# Altium PCB sinc_counter.PcbDoc
Units mm, origin at the board's own origin, x right, y up, seen from the top; angles counter-clockwise.
Board outline 60.07 x 50.04 mm, 2 copper layers (Top Layer, Bottom Layer); 8 components, 11 nets, 75 pads, 20 vias.
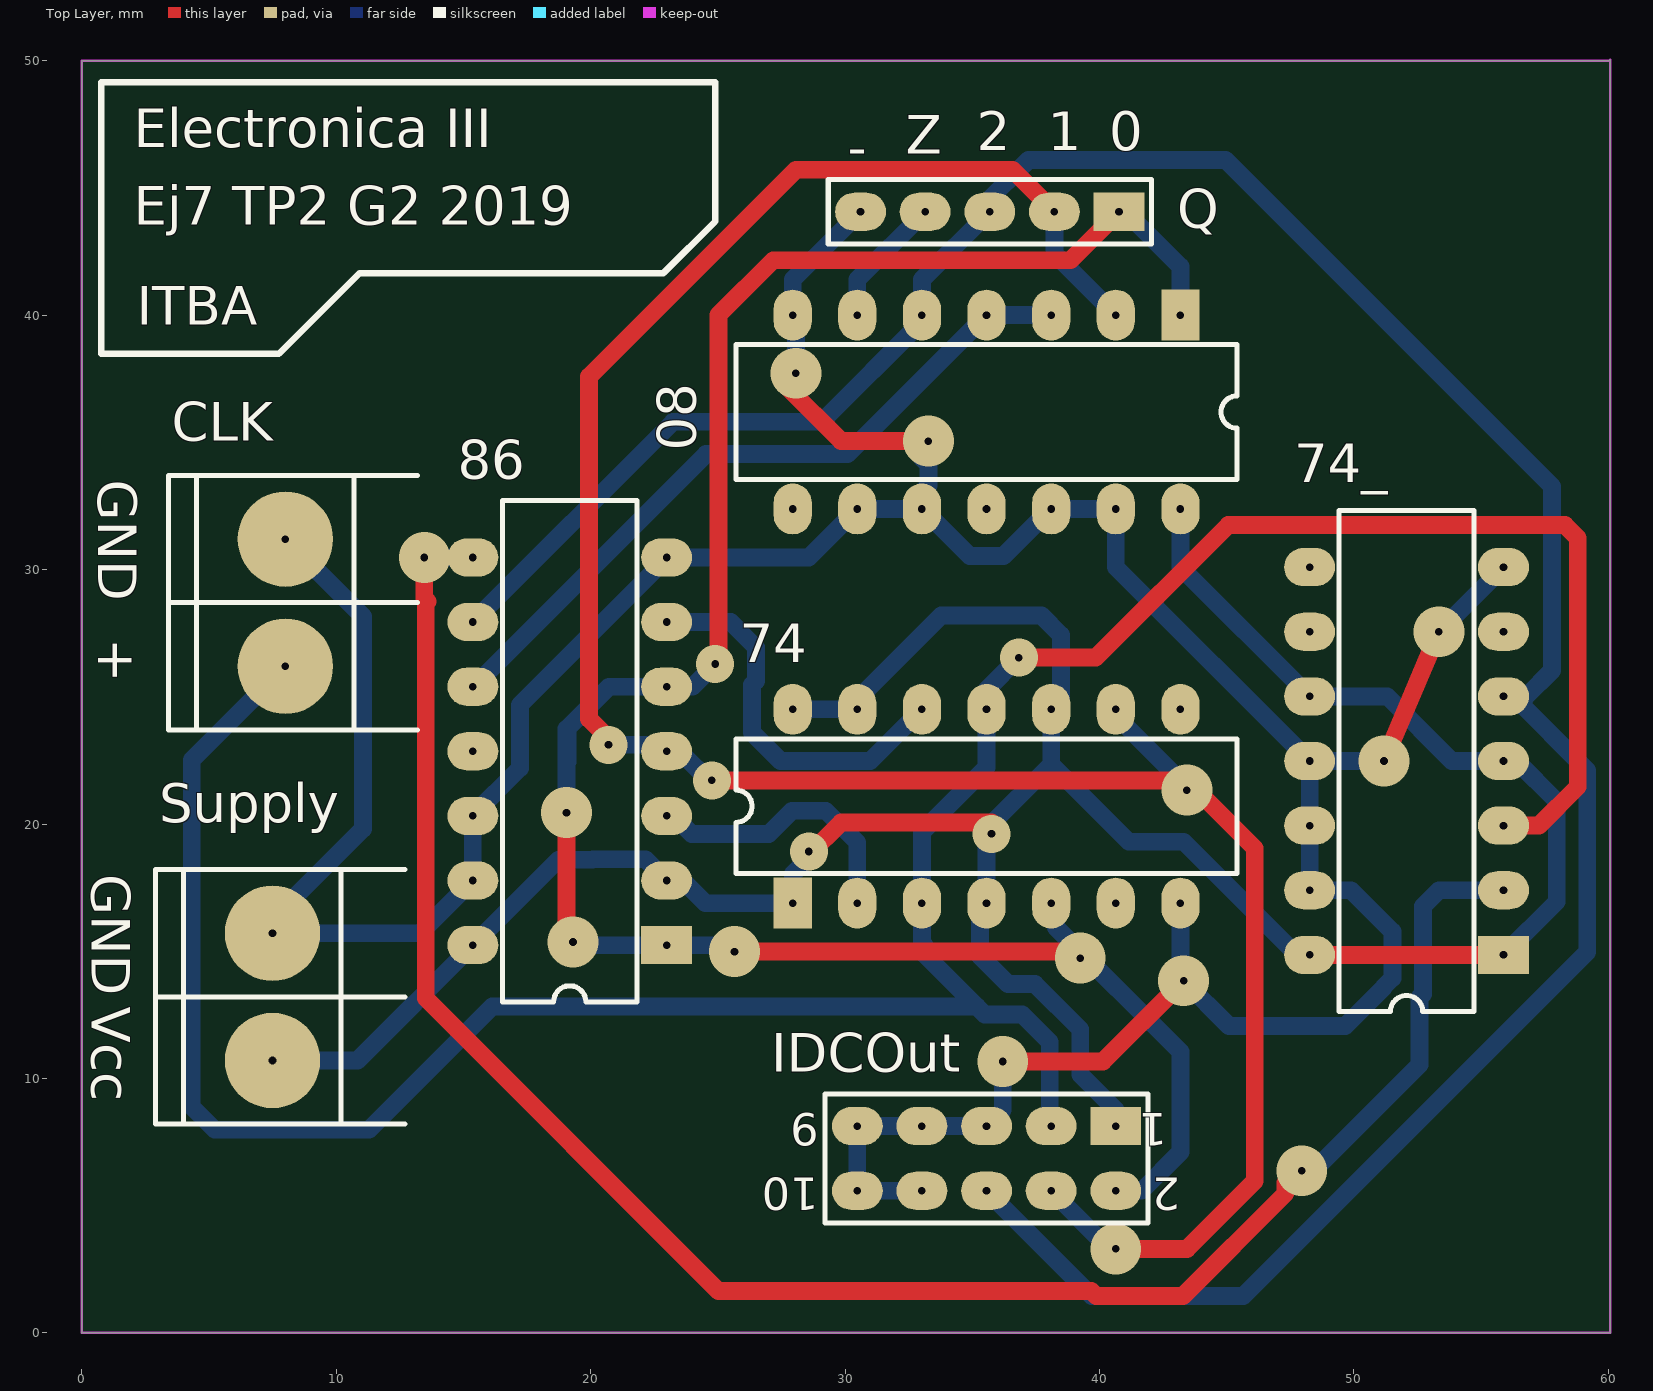
[diagram p0: Top Layer view]
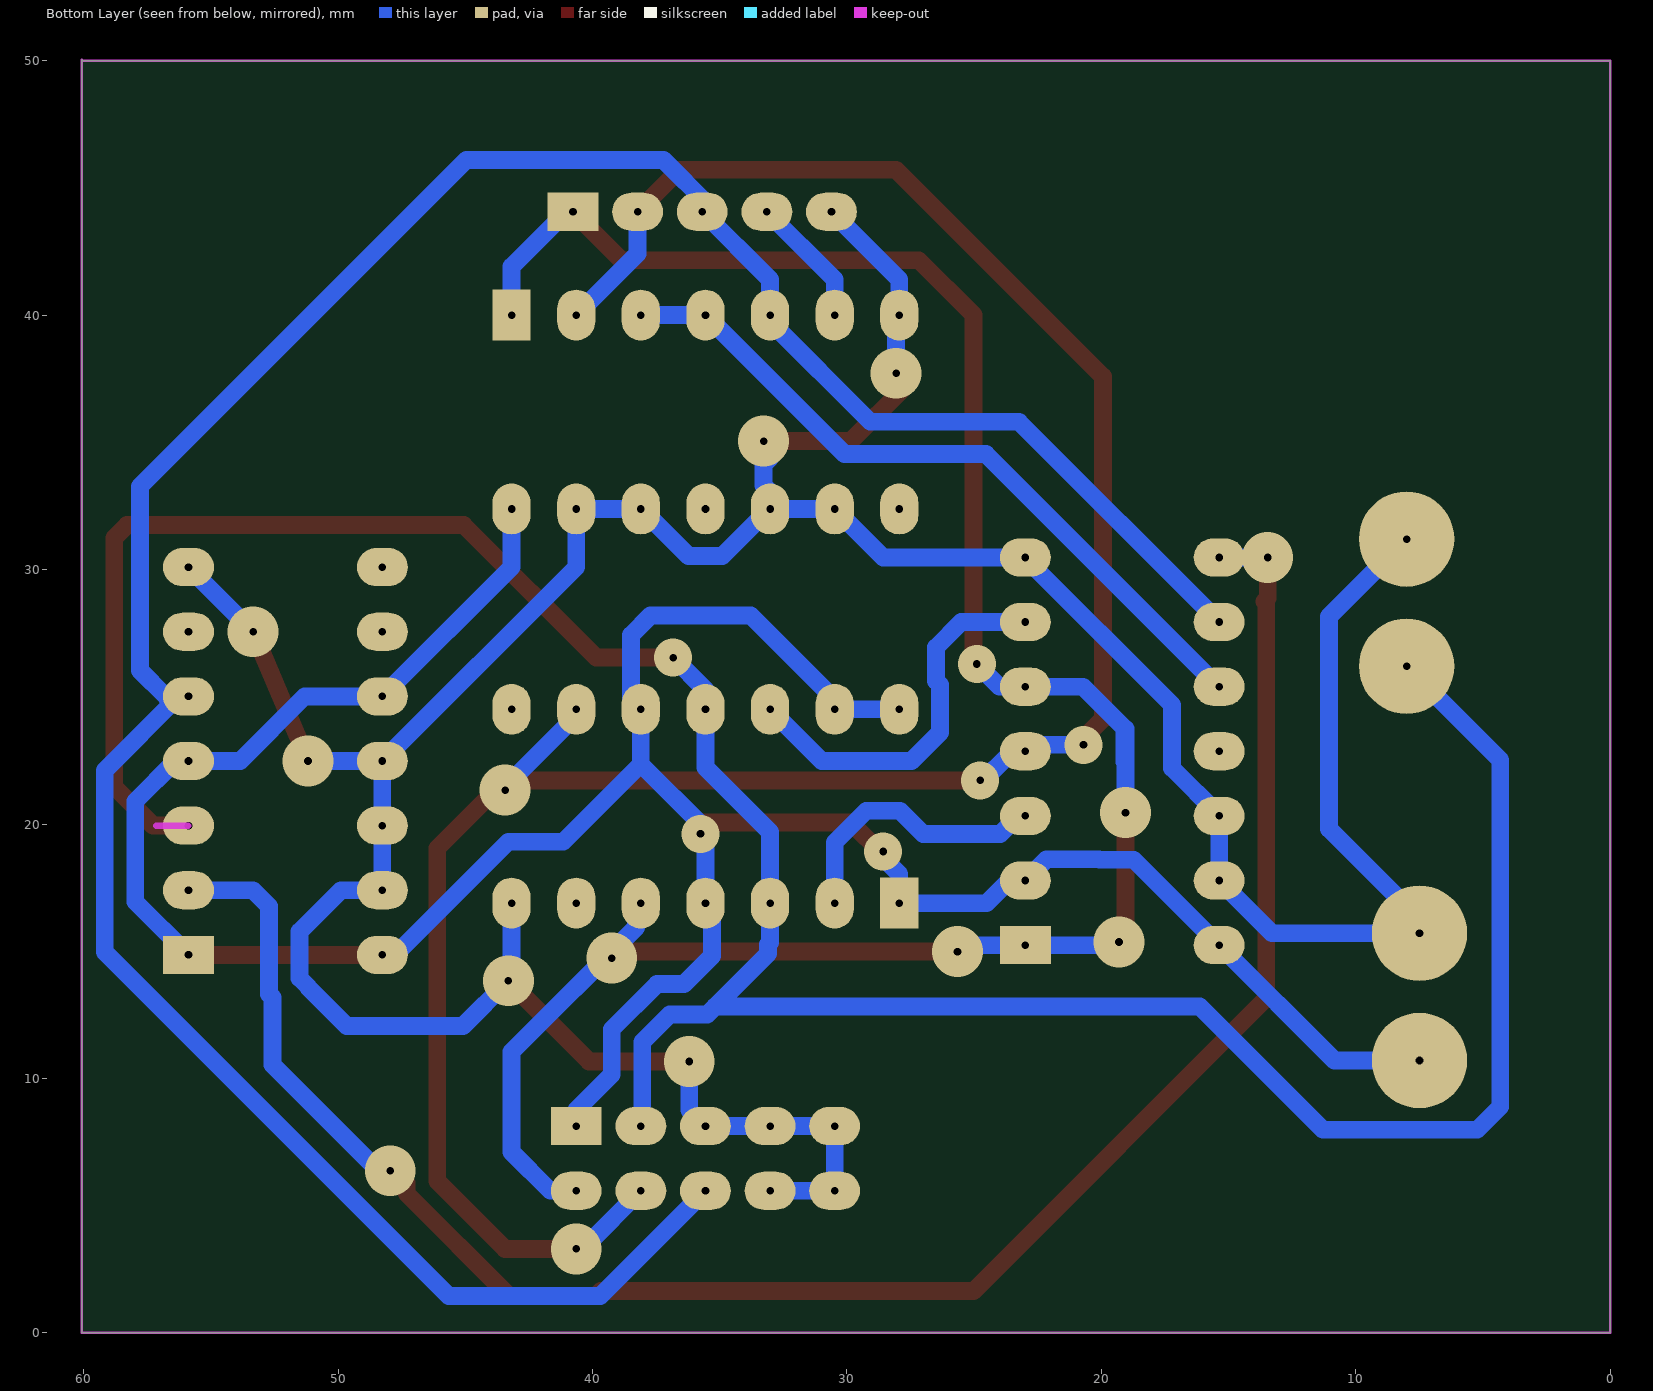
[diagram p1: Bottom Layer view, seen from below]

## Layer stack, top to bottom
Top Solder: solder mask 0.0102, Solder Resist, Dk 3.5
Top Layer: signal copper 0.0356
Dielectric 1: dielectric 0.32, FR-4, Dk 4.8
Bottom Layer: signal copper 0.0356
Bottom Solder: solder mask 0.0102, Solder Resist, Dk 3.5

## Board outline
0,0 0,50 60.033,50 60.071,50.038 60.071,0

## Design rules (kind name [scope] priority, off if disabled: settings)
Clearance [All] p1: gap=0.5
PolygonConnect [All] p1: connectstyle=Relief reliefconductorwidth=0.254 reliefentries=4 polygonreliefangle="90 Angle" airgapwidth=0.254
RoutingVias [All] p1: holewidth=0.3 width=2 viastyle="Through Hole" minholewidth=0.3 minwidth=2 maxholewidth=0.3 maxwidth=2
SolderMaskExpansion [All] p1: expansion=0.102
Width [All] p1: maxlimit=0.7 minlimit=0.7 preferedwidth=0.7
30 further rules are at their usual default settings.

## Components (designator, comment, footprint, x,y, rotation, side; value= is the part's Value field where it differs from the comment)
08 "SN74ALS08N" N014 35.56,36.195 r180 top
74 "SN74LS74AN" N014D 35.56,20.701 r0 top
74_ "SN74LS74AN" N014D 52.07,22.479 r90 top
86 "SN74ALS86N" N014 19.177,22.86 r90 top
CLK "BORNERA 2" BORNERA2 8.001,28.702 r0 top
IDCOut "Header 5X2" HDR2X5 40.64,8.128 r180 top
Q "Header 5" HDR1X5 40.767,44.069 r180 top
Supply "BORNERA 2" BORNERA2 7.493,13.208 r0 top

## Footprints (in the part's own frame and the unit in brackets; to place one, negate y for a bottom-side part, rotate by r counter-clockwise, add the part's x,y. Pads: shape width x height; smd on the part's side, far side on the other; paste and mask are expansions set on the pad)
BORNERA2 [mm] "Bornera con Tornillos 5mm separación"
  round 3.75 hole 0.3: 1(0,2.5) 2(0,-2.5)
  silkscreen extent -4.6,-5 5.2,5, body extent -3.76,-4.89 3.94,5.61, height 10
HDR1X5 [mm] "Connector; Header; 5 Position"
  rect 2x1.5 hole 0.3: 1(0,0)
  oval 2x1.5 hole 0.3: 2(2.54,0) 3(5.08,0) 4(7.62,0) 5(10.16,0)
  silkscreen extent -1.27,-1.27 11.43,1.27
HDR2X5 [mm] "Connector; Header; 5x2 Position"
  rect 2x1.5 hole 0.3: 1(0,0)
  oval 2x1.5 hole 0.3: 2(0,2.54) 3(2.54,0) 4(2.54,2.54) 5(5.08,0) 6(5.08,2.54) 7(7.62,0) 8(7.62,2.54) 9(10.16,0) 10(10.16,2.54)
  silkscreen extent -1.27,-1.27 11.43,3.81
N014 [mm] "DIP; 14 Leads; Row Spacing 7.62 mm; Pitch 2.54 mm"
  rect 1.5x2 hole 0.3: 1(-7.62,-3.81)
  oval 1.5x2 hole 0.3: 2(-5.08,-3.81) 3(-2.54,-3.81) 4(0,-3.81) 5(2.54,-3.81) 6(5.08,-3.81) 7(7.62,-3.81) 8(7.62,3.81) 9(5.08,3.81) 10(2.54,3.81) 11(0,3.81) 12(-2.54,3.81) 13(-5.08,3.81) 14(-7.62,3.81)
  silkscreen extent -9.85,-2.65 9.85,2.65
N014D [mm] "DIP; 14 Leads; Row Spacing 7.62 mm; Pitch 2.54 mm"
  rect 1.5x2 hole 0.3: 1(-7.62,-3.81)
  oval 1.5x2 hole 0.3: 2(-5.08,-3.81) 3(-2.54,-3.81) 4(0,-3.81) 5(2.54,-3.81) 6(5.08,-3.81) 7(7.62,-3.81) 8(7.62,3.81) 9(5.08,3.81) 10(2.54,3.81) 11(0,3.81) 12(-2.54,3.81) 13(-5.08,3.81) 14(-7.62,3.81)
  silkscreen extent -9.85,-2.65 9.85,2.65

## Part data
08: "Quadruple 2-Input Positive-AND Gate"
74 74_: "Dual D-Type Positive-Edge-Triggered Flip-Flop with Preset and Clear"
86: "Quadruple 2-Input Exclusive-OR Gate"
IDCOut: "Header, 5-Pin, Dual row"
Q: "Header, 5-Pin"

## Via types
v1: diameter 2, hole 0.3, Top Layer to Bottom Layer, 14 vias
v2: diameter 1.5, hole 0.3, Top Layer to Bottom Layer, 6 vias

## Nets (pads, with @x,y where several pads share a name; then routed paths per layer and width w, separated by ;. In a path a pad name is that pad's centre, name@x,y a point inside that pad or via, vN(x,y) a via of type N, cw(c..) or ccw(c..) an arc to the next point about the centre after c; other vN are vias at no path point)
CLK: 74.3 74.11 74_.3 CLK.2 IDCOut.3 | length 112
  Top Layer w0.7: 37.592,26.543 39.851,26.543 45.058,31.75 58.293,31.75 58.801,31.242 58.801,21.463 57.277,19.939 74_.3
  Bottom Layer w0.7: CLK.2 4.318,22.519 4.318,8.89 5.225,7.983 11.285,7.983 16.129,12.827 35.179,12.827 ; 74.3 33.02,19.685 35.56,22.225 74.11 35.56,25.273 v2(36.83,26.543) v2@36.83,26.335 ; 74.3@33.274,16.637 33.02,16.383 33.02,15.344 33.096,15.268 33.096,14.91 35.488,12.518 36.961,12.518 38.045,11.434 38.045,8.183 IDCOut.3
GND: 08.7 08.9 08.10 08.12 08.13 74.7 74_.7 74_.11 74_.12 74_.13 86.7 86.12 86.13 CLK.1 IDCOut.5 IDCOut.7 IDCOut.8 IDCOut.9 IDCOut.10 Q.5 Supply.1 | length 149.8
  Top Layer w0.7: v1(28.067,37.719) 27.686,37.211 29.845,35.052 v1(33.274,35.052) ; v1(36.195,10.668) 40.132,10.668 v1@43.18,13.716 ; v1(51.181,22.479) v1(53.34,27.559) v1@53.34,27.305
  Bottom Layer w0.7: CLK.1 11.049,28.154 11.049,19.812 7.493,16.256 Supply.1 13.295,15.708 86.13 86.12 ; 86.12@15.353,20.334 17.217,22.197 17.217,24.683 86.7@22.987,30.453 ; 86.7@22.987,30.226 86.7@22.987,30.453 ; 86.7@23.001,30.466 86.7@22.987,30.453 ; 08.7 27.94,41.402 Q.5 ; v1(28.067,37.719) 08.7@28.067,39.751 ; IDCOut.8 IDCOut.10 IDCOut.9 IDCOut.7 IDCOut.5 ; v1(33.274,35.052) 33.02,35.052 33.02,34.385 33.274,34.131 33.274,33.306 33.02,33.052 08.10 ; IDCOut.5@36.195,8.763 v1(36.195,10.668) ; 08.12@38.073,32.385 36.223,30.535 34.897,30.535 33.047,32.385 08.10 ; 08.12 08.13 40.64,30.099 74_.11 ; 74.7 43.18,13.97 v1(43.307,13.843) 45.085,12.065 49.657,12.065 51.17,13.578 51.17,13.601 51.511,13.942 51.511,15.776 49.888,17.399 74_.13 74_.12 74_.11 ; v1(51.181,22.479) 74_.11 ; v1(53.34,27.559) 74_.7 ; 86.7@22.987,30.453 86.7 28.575,30.48 08.9 08.10
Net08_3: 08.3 08.4 86.10 | length 28.8
  Bottom Layer w0.7: 86.10 15.394,25.4 24.538,34.544 30.099,34.544 08.4 08.3
Net74_2: 74.2 86.3 | length 11.2
  Bottom Layer w0.7: 86.3 23.126,20.459 23.975,19.609 26.998,19.609 27.912,20.523 29.238,20.523 30.48,19.281 74.2
Net74_12: 74.12 86.6 | length 15.3
  Bottom Layer w0.7: 86.6 25.504,27.94 26.492,26.952 26.492,25.626 26.34,25.474 26.34,23.598 27.459,22.479 30.988,22.479 74.12
Net74__2: 74_.2 86.8 | length 77.2
  Top Layer w0.7: v1(13.462,30.48) 13.462,28.874 13.589,28.747 13.517,28.675 13.517,13.153 25.019,1.651 39.675,1.651 39.874,1.452 43.281,1.452 47.301,5.472 47.301,5.899 47.951,6.549 v1(47.951,6.371)
  Bottom Layer w0.7: v1(13.462,30.48) 86.8 ; v1(47.951,6.371) 48.408,6.371 52.578,10.541 52.578,13.179 52.711,13.312 52.711,16.77 53.34,17.399 74_.2
Q0: 08.1 74.5 86.1 86.5 IDCOut.2 Q.1 | length 87.7
  Top Layer w0.7: v1(19.05,20.447) 19.05,15.621 v1(19.304,15.367) ; v2@25.019,26.128 25.019,40.005 27.178,42.164 38.862,42.164 Q.1 ; v1(25.654,14.986) 39.497,14.986 v1(39.243,14.732)
  Bottom Layer w0.7: v1(19.05,20.447) 19.05,23.749 ; 19.101,22.451 19.101,23.777 20.724,25.4 86.5 24.003,25.4 v2@24.445,25.842 ; v1(19.304,15.367) 19.304,15.24 86.1 25.527,15.24 25.654,15.113 v1(25.654,14.986) ; 74.5@38.292,16.191 38.292,15.937 43.18,11.049 43.18,7.112 41.656,5.588 IDCOut.2 ; Q.1 41.021,44.069 43.18,41.91 08.1
  other v2: 24.892,26.289
Q1: 08.2 74.9 86.4 IDCOut.4 Q.2 | length 96.3
  Top Layer w0.7: v2(20.701,23.114) 20.701,23.368 19.939,24.13 19.939,37.592 28.067,45.72 36.576,45.72 Q.2 ; v2(24.765,21.717) v1@42.926,21.717 ; v1(40.64,3.302) 43.434,3.302 46.101,5.969 46.101,19.05 v1@43.688,21.463
  Bottom Layer w0.7: v2(20.701,23.114) 22.733,23.114 86.4 23.495,22.86 24.765,21.59 v2(24.765,21.717) ; IDCOut.4 40.259,3.429 40.767,3.429 v1(40.64,3.302) ; Q.2 38.227,42.418 08.2 ; 74.9 40.64,24.257 43.434,21.463 v1(43.434,21.336)
Q2: 08.5 74_.5 86.9 IDCOut.6 Q.3 | length 108.2
  Bottom Layer w0.7: 86.9 23.241,35.814 29.083,35.814 08.5@33.02,39.751 ; 08.5 33.02,41.402 Q.3 ; Q.3@35.433,44.323 37.211,46.101 44.958,46.101 57.785,33.274 57.785,26.035 56.769,25.019 74_.5 56.261,25.019 59.171,22.109 59.171,14.975 45.648,1.452 39.696,1.452 IDCOut.6
VCC: 08.14 74.1 74.4 74.10 74.13 74.14 74_.1 74_.4 74_.10 74_.14 86.2 86.14 IDCOut.1 Supply.2 | length 119.5
  Top Layer w0.7: v2(28.575,18.923) 28.575,18.796 29.845,20.066 35.757,20.066 v2(35.757,19.615) ; 74_.14 74_.1
  Bottom Layer w0.7: Supply.2 10.835,10.708 86.14 18.724,18.597 20.07,18.597 20.087,18.614 22.153,18.614 86.2 23.622,17.78 24.511,16.891 74.1 27.94,18.034 28.575,18.669 v2(28.575,18.923) ; 74.14 74.13 30.48,24.892 33.782,28.194 37.719,28.194 38.481,27.432 38.481,24.892 74.10 38.1,22.352 ; 74.4 v2@35.56,19.615 ; v2@35.56,19.812 38.1,22.352 ; 74.4@35.687,16.764 35.306,16.383 35.306,14.815 36.403,13.718 37.458,13.718 39.245,11.931 39.245,10.158 40.64,8.763 IDCOut.1 ; 08.14 43.18,30.099 74_.10 51.308,25.019 53.848,22.479 74_.4 56.388,22.479 57.971,20.896 57.971,16.95 74_.1 ; 74_.14 47.752,14.859 43.307,19.304 41.148,19.304 38.1,22.352
Z: 08.6 Q.4 | length 5.2
  Bottom Layer w0.7: 08.6 30.48,41.402 Q.4
pads on no net: 08.8 08.11 74.6 74.8 74_.6 74_.8 74_.9 86.11

## Keep-outs
Bottom Layer:
  lines w0.254: 55.88,19.939 57.15,19.939
Keep-Out Layer:
  the board outline again, w0.1

## Silkscreen, mask and mechanical layers (free items; w line width, h text height)
Top Overlay:
  lines w0.254: 0.762,38.481 0.762,49.149 24.892,49.149 24.892,43.688 22.86,41.656 10.922,41.656 7.747,38.481 0.762,38.481
  text "Electronica III" at 2.032,46.609 h1.52
  text "2" at 35.179,46.482 h1.52
  text "1" at 37.973,46.482 h1.52
  text "0" at 40.386,46.482 h1.52
  text "Z" at 32.385,46.355 h1.52
  text "-" at 30.099,45.847 h1.52
  text "Ej7 TP2 G2 2019" at 2.032,43.561 h1.52
  text "ITBA" at 2.159,39.624 h1.52
  text "GND" at 0.635,33.528 h1.52 r270
  text "+" at 0.635,27.305 h1.52 r270
  text "GND" at 0.381,18.034 h1.52 r270
  text "Vcc" at 0.381,12.827 h1.52 r270

## Text inside footprints (layer, text, board x,y; h text height)
IDCOut: Top Overlay "2" at 43.18,6.096 h1.27 r180; Top Overlay "1" at 42.672,8.636 h1.27 r180; Top Overlay "9" at 28.956,8.636 h1.27 r180; Top Overlay "10" at 28.956,6.096 h1.27 r180